# Altium PCB PCB_贴片有源晶振转直插_2023-11-25.pcbdoc
Units mm, origin at the board's own origin, x right, y up, seen from the top; angles counter-clockwise.
Board outline 46.99 x 35.91 mm, 2 copper layers (Top Layer, Bottom Layer); 3 components, 4 nets, 12 pads, 0 vias.
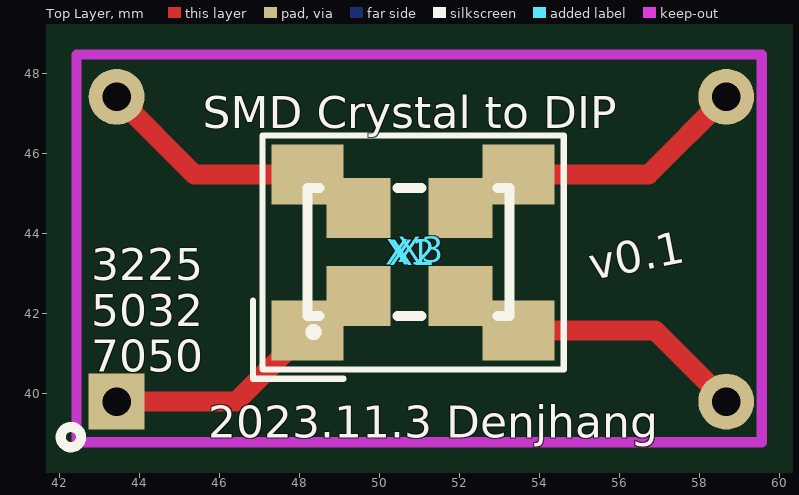
[diagram p0: Top Layer view]
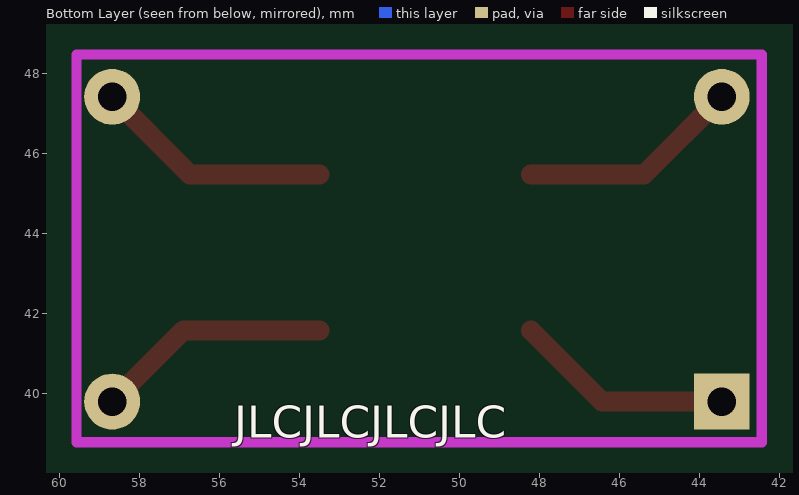
[diagram p1: Bottom Layer view, seen from below]

## Layer stack, top to bottom
Top Layer: signal copper (thickness not stored)
Dielectric: dielectric 0.32, FR-4, Dk 4.8
Bottom Layer: signal copper (thickness not stored)

## Board outline
72.39,25.4 25.4,25.4 25.4,61.309 72.39,61.309

## Components (designator, comment, footprint, x,y, rotation, side; value= is the part's Value field where it differs from the comment)
X1 "4.9152MHz" OSC-SMD_4P-L5.0-W3.2-BL_SIT1602AI 50.755,43.546 r0 top
X2 "60MHz" OSC-SMD_4P-L7.0-W5.0-BL 50.844,43.535 r0 top
X3 "长方形晶振模块" 长方形晶振模块 51.054,43.745 r0 top

## Footprints (in the part's own frame and the unit in brackets; to place one, negate y for a bottom-side part, rotate by r counter-clockwise, add the part's x,y. Pads: shape width x height; smd on the part's side, far side on the other; paste and mask are expansions set on the pad)
OSC-SMD_4P-L5.0-W3.2-BL_SIT1602AI [mm]
  rect 1.6x1.5 smd paste+0 mask+0.051: 1(-1.27,-1.1) 2(1.27,-1.1) 3(1.27,1.1) 4(-1.27,1.1)
  silkscreen extent -2.55,-2.1 2.5,1.6
OSC-SMD_4P-L7.0-W5.0-BL [mm]
  rect 1.8x1.5 smd paste+0 mask+0.051: 1(-2.64,-1.95) 2(2.64,-1.95) 3(2.64,1.95) 4(-2.64,1.95)
  silkscreen extent -4,-3.16 3.77,2.93
长方形晶振模块 [mil]
  rect 55x55 hole 28 paste+0 mask+2: 1(-300,-155)
  round 55 hole 28 paste+0 mask+2: 7(300,-155) 8(300,145) 14(-300,145)
  silkscreen extent -355,-200 -335,-180

## Nets (pads, with @x,y where several pads share a name; then routed paths per layer and width w, separated by ;. In a path a pad name is that pad's centre, name@x,y a point inside that pad or via, vN(x,y) a via of type N, cw(c..) or ccw(c..) an arc to the next point about the centre after c; other vN are vias at no path point)
GND: X1.2 X2.2 X3.7 | length 5.9
  Top Layer w0.5: X2.2 56.897,41.585 X3.7
OUT: X1.3 X2.3 X3.8 | length 6
  Top Layer w0.5: X2.3 56.731,45.485 X3.8
S$3646: X2.1 X3.1 | length 5.5
  Top Layer w0.5: X3.1 46.427,39.808 X2.1
VCC: X1.4 X2.4 X3.14 | length 5.6
  Top Layer w0.5: X3.14 45.377,45.485 X2.4
pads on no net: X1.1

## Silkscreen, mask and mechanical layers (free items; w line width, h text height)
Top Overlay:
  text "SMD Crystal to DIP" at 45.593,46.647 h0.8
  text "v0.1" at 55.321,42.844 h0.8 r11
  text "3225" at 42.799,42.837 h0.8
  text "5032" at 42.799,41.694 h0.8
  text "7050" at 42.799,40.551 h0.8
  text "2023.11.3 Denjhang" at 45.72,38.9 h0.8
Bottom Overlay:
  text "JLCJLCJLCJLC" at 55.626,38.9 h0.8